# EAGLE board CoolNumbers (EAGLE 5.10)
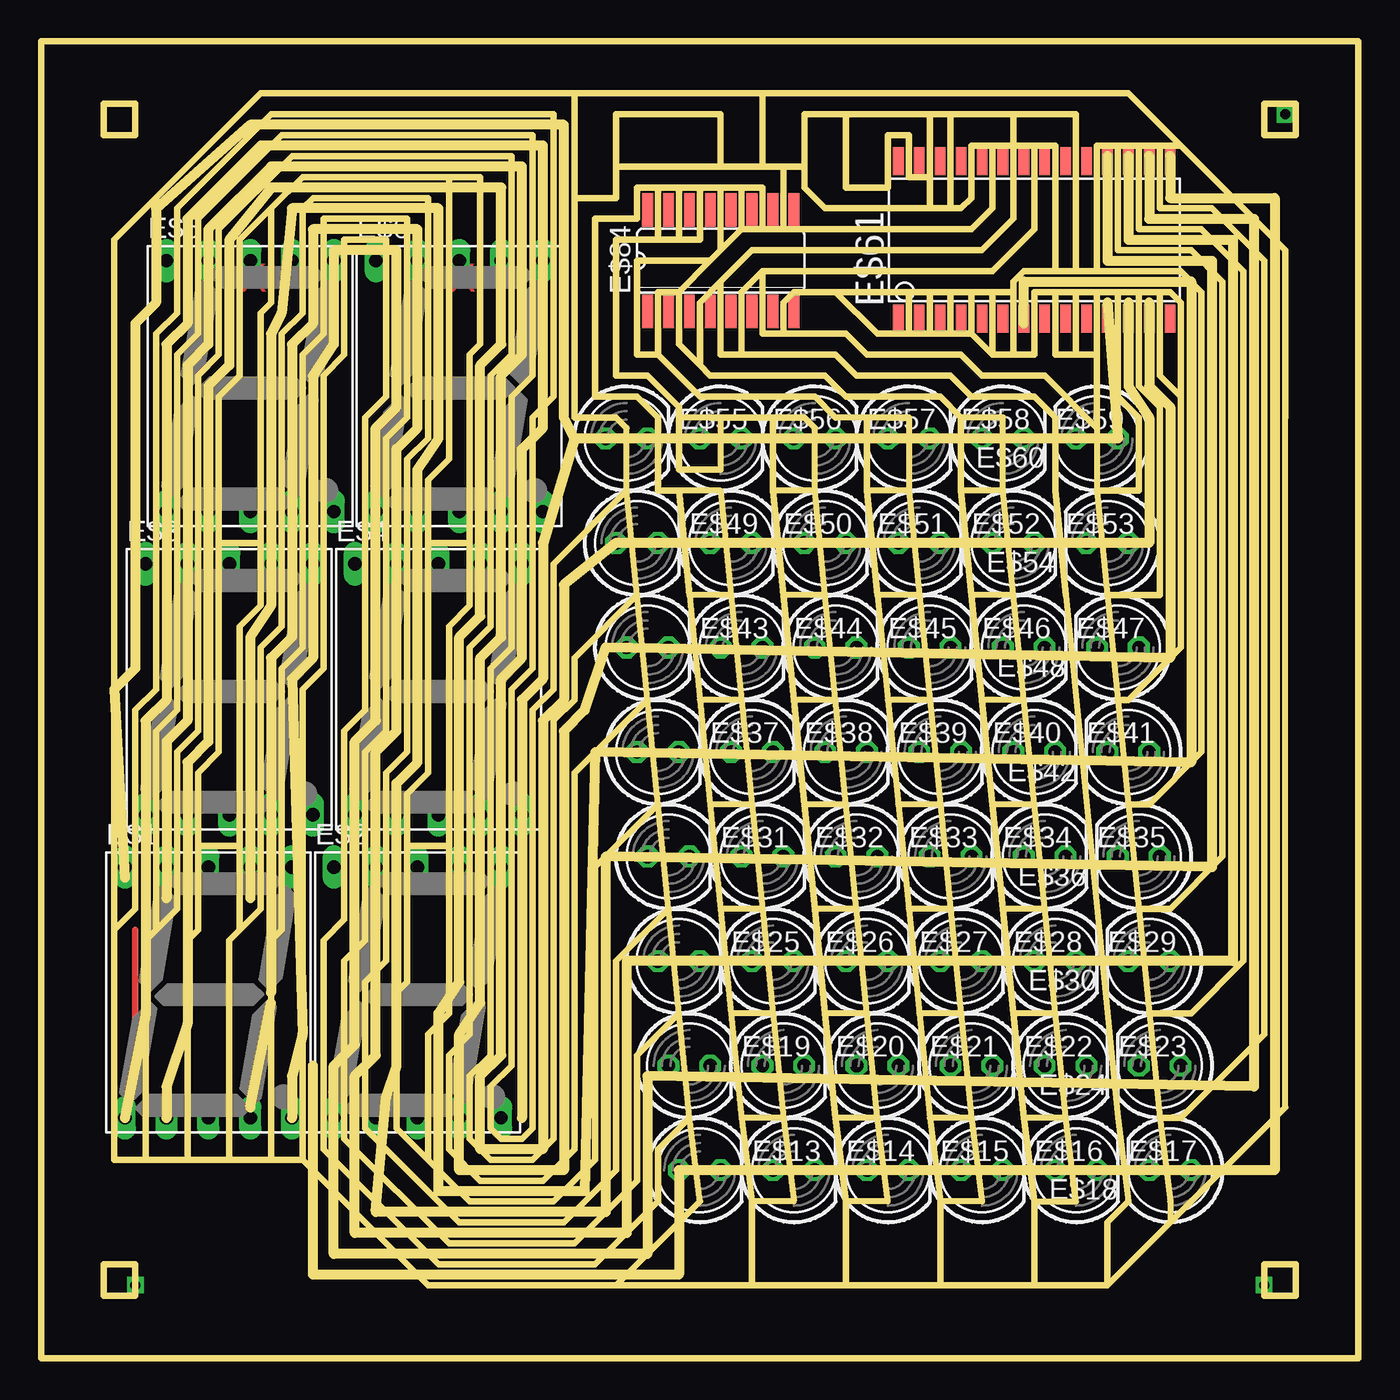
[diagram p0: board, top side]

Size 80.01 x 80.01 mm. Coordinates in mm from the lower left corner, seen from the top.
Outline: 39.37,14.61 40.01,9.53 34.92,4.45
Outline: 39.37,14.61 38.73,20.95
Outline: 38.73,20.95 38.1,27.3
Outline: 38.1,27.3 37.47,33.66
Outline: 37.47,33.66 36.83,40.01
Outline: 36.83,40.01 36.2,46.35
Outline: 36.2,46.35 35.56,52.7
Outline: 35.56,52.7 35.56,56.52 34.92,57.15 32.38,57.15 32.38,70.48
Outline: 39.37,46.35 40.01,40.01
Outline: 40.01,40.01 40.64,33.66
Outline: 40.64,33.66 41.27,27.3
Outline: 41.27,27.3 41.91,20.95
Outline: 41.91,20.95 42.55,14.61
Outline: 42.55,14.61 43.18,9.53
Outline: 41.91,46.35 41.27,52.7 38.73,52.7
Outline: 41.91,46.35 42.55,40.01
Outline: 42.55,40.01 43.18,33.66
Outline: 43.18,33.66 43.81,27.3
Outline: 43.81,27.3 44.45,20.95
Outline: 44.45,20.95 45.09,14.61
Outline: 45.09,14.61 45.72,9.53 43.18,9.53
Outline: 45.09,14.61 42.55,14.61
Outline: 44.45,20.95 41.91,20.95
Outline: 43.81,27.3 41.27,27.3
Outline: 43.18,33.66 40.64,33.66
Outline: 42.55,40.01 40.01,40.01
Outline: 41.91,46.35 39.37,46.35
Outline: 38.73,57.15 41.27,57.15 41.27,53.98 38.73,53.98 38.73,57.15
Outline: 39.37,14.61 37.47,12.7 37.47,9.53 33.66,5.71 24.13,5.71 17.14,12.7 17.14,25.4 18.41,26.67 18.41,38.1 19.68,39.37 19.68,57.15 20.95,58.42 20.95,67.94 18.41,67.94 18.41,60.96 17.14,59.69 17.14,41.91 15.88,40.64 15.88,12.06
Outline: 50.8,14.61 51.44,9.53 48.9,9.53
Outline: 50.8,14.61 50.16,20.95
Outline: 50.16,20.95 49.53,27.3
Outline: 49.53,27.3 48.9,33.66
Outline: 48.9,33.66 48.26,40.01
Outline: 48.26,40.01 47.62,46.35
Outline: 47.62,46.35 46.99,52.7
Outline: 46.99,52.7 46.99,56.52 46.35,57.15 44.45,57.15
Outline: 50.8,46.35 51.44,40.01
Outline: 51.44,40.01 52.07,33.66
Outline: 52.07,33.66 52.7,27.3
Outline: 52.7,27.3 53.34,20.95
Outline: 53.34,20.95 53.98,14.61
Outline: 53.98,14.61 54.61,9.53
Outline: 52.7,57.15 52.7,52.7
Outline: 52.7,52.7 53.34,46.35
Outline: 53.34,46.35 53.98,40.01
Outline: 53.98,40.01 54.61,33.66
Outline: 54.61,33.66 55.24,27.3
Outline: 55.24,27.3 55.88,20.95
Outline: 55.88,20.95 56.52,14.61
Outline: 56.52,14.61 57.15,9.53 54.61,9.53
Outline: 56.52,14.61 53.98,14.61
Outline: 55.88,20.95 53.34,20.95
Outline: 55.24,27.3 52.7,27.3
Outline: 54.61,33.66 52.07,33.66
Outline: 53.98,40.01 51.44,40.01
Outline: 53.34,46.35 50.8,46.35
Outline: 52.7,52.7 50.16,52.7
Outline: 52.7,57.15 50.16,57.15
Outline: 50.16,57.15 48.26,57.15 46.99,58.42 40.01,58.42 37.47,60.96
Outline: 46.99,52.7 44.45,52.7
Outline: 47.62,46.35 45.09,46.35
Outline: 48.26,40.01 45.72,40.01
Outline: 48.9,33.66 46.35,33.66
Outline: 49.53,27.3 46.99,27.3
Outline: 50.16,20.95 47.62,20.95
Outline: 50.8,14.61 48.26,14.61
Outline: 62.23,14.61 62.87,9.53 60.33,9.53
Outline: 62.23,14.61 61.59,20.95
Outline: 61.59,20.95 60.96,27.3
Outline: 60.96,27.3 60.33,33.66
Outline: 60.33,33.66 59.69,40.01
Outline: 59.69,40.01 59.05,46.35
Outline: 59.05,46.35 58.42,52.7
Outline: 58.42,52.7 58.42,57.15 55.88,57.15
Outline: 68.58,8.26 68.58,9.53 67.94,14.61
Outline: 64.14,56.52 64.14,57.15 64.14,60.96
Outline: 64.14,56.52 64.14,52.7
Outline: 64.14,52.7 64.77,46.35
Outline: 64.77,46.35 65.41,40.01
Outline: 65.41,40.01 66.04,33.66
Outline: 66.04,33.66 66.67,27.3
Outline: 66.67,27.3 67.31,20.95
Outline: 67.31,20.95 67.94,14.61
Outline: 58.42,52.7 55.88,52.7
Outline: 59.05,46.35 56.52,46.35
Outline: 59.69,40.01 57.15,40.01
Outline: 60.33,33.66 57.78,33.66
Outline: 60.96,27.3 58.42,27.3
Outline: 61.59,20.95 59.05,20.95
Outline: 62.23,14.61 59.69,14.61
Outline: 4.45,26.04 5.71,27.3 5.71,39.37 6.99,40.64 6.99,62.23 8.26,63.5 8.26,69.85 13.97,75.56 31.11,75.56 31.11,58.42 29.84,57.15 29.84,41.91 28.57,40.64 28.57,17.78 27.3,16.51 27.3,13.97 27.94,13.34 29.21,13.34 29.84,13.97 29.84,39.37 31.11,40.64 31.11,48.26 35.56,52.7
Outline: 6.99,26.04 8.26,27.3 8.26,36.83 9.53,38.1 9.53,59.69 10.79,60.96 10.79,68.58 15.24,73.03 28.57,73.03 28.57,60.96 27.3,59.69 27.3,44.45 26.04,43.18 26.04,19.68 24.77,18.41 24.77,12.7 26.67,10.79 30.48,10.79 32.38,12.7 32.38,35.56 36.83,40.01
Outline: 12.06,26.04 13.34,27.3 13.34,43.18 14.61,44.45 14.61,62.23 15.88,63.5 15.88,69.85 16.51,70.48 23.5,70.48 23.5,55.88 22.23,54.61 22.23,36.83 20.95,35.56 20.95,24.13 19.68,22.86 19.68,13.97 25.4,8.26 31.75,8.26 34.92,11.43 34.92,24.13 38.1,27.3
Outline: 11.43,12.06 11.43,25.4 12.06,26.04
Outline: 13.97,12.06 13.97,25.4 14.61,26.04 14.61,41.91 15.88,43.18 15.88,60.96 17.14,62.23 17.14,69.22 22.23,69.22 22.23,57.15 20.95,55.88 20.95,38.1 19.68,36.83 19.68,25.4 18.41,24.13 18.41,13.34 24.77,6.99 32.38,6.99 36.2,10.79 36.2,18.41 38.73,20.95
Outline: 15.88,12.06 13.97,12.06
Outline: 23.5,12.06 23.5,19.68 24.77,20.95 24.77,31.11
Outline: 6.99,26.04 6.35,25.4 6.35,12.06
Outline: 9.53,31.11 9.53,35.56 10.79,36.83 10.79,49.53
Outline: 9.53,31.11 9.53,26.04 8.89,25.4 8.89,12.06
Outline: 6.99,26.04 6.99,38.1 8.26,39.37 8.26,60.96 9.53,62.23 9.53,69.22 14.61,74.3 29.84,74.3 29.84,59.69 28.57,58.42 28.57,43.18 27.3,41.91 27.3,18.41 26.04,17.14 26.04,13.34 27.3,12.06 29.84,12.06 31.11,13.34 31.11,38.73 32.38,40.01 32.38,42.55 36.2,46.35
Outline: 12.06,26.04 12.06,31.11
Outline: 12.06,31.11 12.06,44.45 13.34,45.72 13.34,49.53
Outline: 22.23,31.11 22.23,22.86 21.59,22.23 21.59,13.97 23.5,12.06
Outline: 22.23,31.11 22.23,34.29 23.5,35.56 23.5,49.53
Outline: 24.77,31.11 24.77,44.45 26.04,45.72 26.04,49.53
Outline: 4.45,26.04 4.45,67.94 13.34,76.83 32.38,76.83
Outline: 13.34,49.53 13.34,63.5 13.97,64.14 13.97,69.85
Outline: 9.53,31.11 12.06,31.11
Outline: 10.79,49.53 13.34,49.53
Outline: 26.04,49.53 23.5,49.53
Outline: 24.77,31.11 22.23,31.11
Outline: 26.04,49.53 26.04,60.96 26.67,61.59 26.67,71.75 24.77,71.75
Outline: 4.45,26.04 4.45,12.06 6.35,12.06
Outline: 10.79,49.53 10.79,58.42 12.06,59.69 12.06,67.94 13.97,69.85
Outline: 23.5,49.53 23.5,53.34 24.77,54.61 24.77,71.75
Outline: 32.38,70.48 32.38,76.83
Outline: 24.77,71.75 15.88,71.75 13.97,69.85
Outline: 37.47,33.66 33.66,29.84 33.66,12.06 31.11,9.53 26.04,9.53 23.5,12.06
Outline: 39.37,46.35 38.73,52.7
Outline: 48.9,9.53 48.26,14.61
Outline: 48.26,14.61 47.62,20.95
Outline: 47.62,20.95 46.99,27.3
Outline: 46.99,27.3 46.35,33.66
Outline: 46.35,33.66 45.72,40.01
Outline: 45.72,40.01 45.09,46.35
Outline: 45.09,46.35 44.45,52.7
Outline: 50.8,46.35 50.16,52.7
Outline: 50.16,52.7 50.16,57.15
Outline: 60.33,9.53 59.69,14.61
Outline: 59.69,14.61 59.05,20.95
Outline: 59.05,20.95 58.42,27.3
Outline: 58.42,27.3 57.78,33.66
Outline: 57.78,33.66 57.15,40.01
Outline: 57.15,40.01 56.52,46.35
Outline: 56.52,46.35 55.88,52.7
Outline: 55.88,52.7 55.88,57.15
Outline: 13.97,12.06 11.43,12.06
Outline: 11.43,12.06 8.89,12.06
Outline: 8.89,12.06 6.35,12.06
Outline: 67.94,14.61 69.22,14.61 74.3,19.68 74.3,66.67 71.12,69.85 67.94,69.85 67.94,73.66
Outline: 67.31,20.95 69.85,20.95 73.03,24.13 73.03,66.04 70.48,68.58 66.67,68.58 66.67,73.66
Outline: 66.67,27.3 68.58,27.3 71.75,30.48 71.75,65.41 69.85,67.31 65.41,67.31 65.41,73.66
Outline: 66.04,33.66 67.31,33.66 70.48,36.83 70.48,64.77 69.22,66.04 64.14,66.04
Outline: 65.41,40.01 66.04,40.01 69.22,43.18 69.22,58.42
Outline: 64.77,46.35 67.94,46.35 67.94,57.78 66.67,59.05 66.67,64.77
Outline: 64.14,60.96 64.14,64.77
Outline: 65.41,64.77 65.41,58.42 66.67,57.15 66.67,52.7 64.14,52.7
Outline: 69.22,58.42 67.94,59.69 67.94,64.77
Outline: 64.14,66.04 64.14,73.66 65.41,73.66
Outline: 65.41,73.66 66.67,73.66
Outline: 66.67,73.66 67.94,73.66
Outline: 60.33,73.66 61.59,73.66 61.59,66.04
Outline: 69.22,58.42 69.22,64.14 68.58,64.77 67.94,64.77
Outline: 64.14,66.04 62.87,66.04
Outline: 62.87,66.04 61.59,66.04
Outline: 62.87,66.04 62.87,75.56 59.05,75.56
Outline: 56.52,62.23 55.24,62.23
Outline: 55.24,62.23 53.98,62.23
Outline: 53.98,62.23 52.7,62.23
Outline: 52.7,62.23 50.8,62.23 48.26,64.77
Outline: 61.59,64.77 60.33,64.77 60.33,60.96 59.05,60.96
Outline: 61.59,64.77 62.87,64.77
Outline: 62.87,64.77 64.14,64.77
Outline: 64.14,64.77 65.41,64.77
Outline: 65.41,64.77 66.67,64.77
Outline: 66.67,64.77 67.94,64.77
Outline: 52.7,57.15 51.44,57.15
Outline: 61.59,66.04 59.69,66.04 59.05,65.41 59.05,64.77
Outline: 48.26,64.77 52.7,64.77
Outline: 52.7,64.77 53.98,64.77
Outline: 53.98,64.77 55.24,64.77
Outline: 55.24,64.77 56.52,64.77
Outline: 56.52,64.77 57.78,64.77
Outline: 57.78,64.77 59.05,64.77
Outline: 61.59,64.77 61.59,60.96 62.87,60.96
Outline: 45.09,62.23 45.09,64.14 45.72,64.77 48.26,64.77
Outline: 43.81,66.04 43.81,62.23 45.09,62.23
Outline: 60.33,73.66 60.33,68.58 57.78,66.04 43.81,66.04
Outline: 42.55,60.96 42.55,64.77 43.81,66.04
Outline: 42.55,60.96 41.27,60.96 41.27,65.41
Outline: 59.05,73.66 60.33,73.66
Outline: 38.73,64.77 38.73,61.59 40.01,60.33
Outline: 57.78,73.66 59.05,73.66
Outline: 59.05,73.66 59.05,69.22 57.15,67.31 43.18,67.31 41.27,65.41
Outline: 42.55,68.58 43.81,68.58
Outline: 43.81,68.58 45.09,68.58
Outline: 45.09,68.58 56.52,68.58 57.78,69.85 57.78,73.66
Outline: 57.78,73.66 56.52,73.66 56.52,70.48 55.88,69.85 55.24,69.85
Outline: 55.24,69.85 53.98,69.85
Outline: 53.98,69.85 47.62,69.85 46.35,71.12 46.35,72.39
Outline: 45.09,72.39 45.09,68.58
Outline: 40.01,60.33 40.64,59.69 47.62,59.69 48.9,58.42 54.61,58.42 55.88,57.15
Outline: 40.01,60.33 40.01,64.14 41.27,65.41
Outline: 37.47,71.12 38.73,71.12
Outline: 41.27,71.12 42.55,71.12
Outline: 45.09,62.23 48.9,62.23 50.16,60.96 55.88,60.96 57.15,59.69 60.96,59.69 64.14,56.52
Outline: 42.55,60.96 48.26,60.96 49.53,59.69 55.24,59.69 56.52,58.42 60.33,58.42 61.59,57.15 61.59,52.7 62.23,46.35 65.41,14.61 66.04,9.53 64.77,8.26 64.77,4.45
Outline: 38.73,64.77 40.64,66.67
Outline: 40.64,66.67 41.27,67.31
Outline: 41.27,67.31 42.55,68.58
Outline: 38.73,64.77 37.47,64.77 37.47,60.96
Outline: 44.45,57.15 40.64,57.15
Outline: 38.73,67.94 40.01,67.94 40.01,71.12
Outline: 42.55,68.58 42.55,71.12
Outline: 44.45,52.7 44.45,57.15
Outline: 37.47,60.96 36.2,60.96 36.2,66.67 40.64,66.67
Outline: 38.73,52.7 37.47,52.7 37.47,57.15 36.2,58.42 33.66,58.42 33.66,69.22 36.2,69.22 36.2,71.12 37.47,71.12
Outline: 41.27,71.12 41.27,67.31
Outline: 37.47,71.12 37.47,67.94
Outline: 37.47,67.94 34.92,67.94 34.92,59.69 36.83,59.69 38.73,57.78 38.73,57.15
Outline: 37.47,67.94 38.73,67.94
Outline: 52.7,62.23 52.7,64.77
Outline: 53.98,62.23 53.98,64.77
Outline: 55.24,62.23 55.24,64.77
Outline: 56.52,62.23 56.52,64.77
Outline: 43.81,68.58 43.81,71.12 42.55,71.12
Outline: 53.98,75.56 48.9,75.56
Outline: 48.9,75.56 46.35,75.56 46.35,72.39
Outline: 32.38,76.83 41.27,76.83 43.81,76.83
Outline: 53.98,75.56 55.24,75.56
Outline: 55.24,75.56 59.05,75.56
Outline: 69.22,73.66 67.94,73.66
Outline: 53.98,69.85 53.98,71.75
Outline: 53.98,71.75 53.98,75.56
Outline: 55.24,75.56 55.24,69.85
Outline: 45.09,72.39 43.81,72.39
Outline: 43.81,72.39 41.27,72.39
Outline: 48.9,75.56 48.9,71.12 51.44,71.12 51.44,74.3 52.7,74.3 52.7,71.75 53.98,71.75
Outline: 38.73,71.12 38.73,67.94
Outline: 45.09,72.39 46.35,72.39
Outline: 41.27,72.39 41.27,75.56 34.92,75.56 34.92,72.39
Outline: 0,80 0,0 80.01,0 80.01,80.01
Outline: 0,80.01 80,80.01
Outline: 68.58,8.26 75.56,15.24 75.56,57.15 75.56,67.31 66.04,76.83 43.81,76.83
Outline: 15.88,12.06 23.5,4.45 34.92,4.45
Outline: 38.73,71.12 40.01,71.12
Outline: 40.01,71.12 41.27,71.12
Outline: 34.92,4.45 43.18,4.45
Outline: 43.18,4.45 48.9,4.45
Outline: 48.9,4.45 54.61,4.45
Outline: 54.61,4.45 60.33,4.45
Outline: 60.33,4.45 64.77,4.45
Outline: 60.33,9.53 60.33,4.45
Outline: 43.18,9.53 43.18,4.45
Outline: 48.9,9.53 48.9,4.45
Outline: 54.61,9.53 54.61,4.45
Outline: 68.58,8.26 64.77,4.45
Outline: 59.05,73.66 59.05,75.56
Outline: 59.05,60.96 57.78,60.96
Outline: 57.78,60.96 56.52,62.23
Outline: 57.78,60.96 57.78,64.77
Outline: 59.05,60.96 59.05,64.77
Outline: 41.27,72.39 34.92,72.39
Outline: 62.87,60.96 64.14,60.96
Outline: 62.87,60.96 62.87,64.77
Outline: 43.81,76.83 43.81,72.39
Outline: 32.38,70.48 34.92,70.48 34.92,72.39
Outline: 76.2,76.2 76.2,74.3 74.3,74.3 74.3,76.2 76.2,76.2
Outline: 76.2,3.81 74.3,3.81 74.3,5.71 76.2,5.71 76.2,3.81
Outline: 3.81,3.81 3.81,5.71 5.71,5.71 5.71,3.81 3.81,3.81
Outline: 3.81,76.2 5.71,76.2 5.71,74.3 3.81,74.3 3.81,76.2
Copper layers (1*16): Top 0.035mm / dielectric 1.5mm / Bottom 0.035mm
Design rules "default": minimum track width 10mil, minimum drill 24mil, track to track 8mil, track to pad 8mil, pad to pad 8mil, via to via 8mil, smd to smd 8mil, copper to edge 40mil, drill to drill 8mil, minimum pad ring 10mil, minimum via ring 8mil, stop-mask expansion 4mil, vias tented up to drill 0mil, thermal gap 10mil
Milling: 150 lines

## Footprints (pad centres in the part's own frame; a part is rotated, then mirrored left to right if it is on the bottom)
HDSP-M = drill 0.813 long: 1 -5.08,-7.62; 2 -2.54,-7.62; 3 0,-7.62; 4 2.54,-7.62; 5 5.08,-7.62; 6 5.08,7.62; 7 2.54,7.62; 8 0,7.62; 9 -2.54,7.62; 10 -5.08,7.62
LED5MM = drill 0.813 octagon: A -1.27,0; K 1.27,0
SO28W = smd 0.65 x 1.7: 1 -7.62,-4.78; 2 -6.35,-4.78; 3 -5.08,-4.78; 4 -3.81,-4.78; 5 -2.54,-4.78; 6 -1.27,-4.78; 7 0,-4.78; 8 1.27,-4.78; 9 2.54,-4.78; 10 3.81,-4.78; 11 5.08,-4.78; 12 6.35,-4.78; 13 7.62,-4.78; 14 8.89,-4.78; 15 8.89,4.78; 16 7.62,4.78; 17 6.35,4.78; 18 5.08,4.78; 19 3.81,4.78; 20 2.54,4.78; 21 1.27,4.78; 22 0,4.78; 23 -1.27,4.78; 24 -2.54,4.78; 25 -3.81,4.78; 26 -5.08,4.78; 27 -6.35,4.78; 28 -7.62,4.78
SO16 = smd 0.66 x 2.032: 1 -4.445,-3.073; 2 -3.175,-3.073; 3 -1.905,-3.073; 4 -0.635,-3.073; 5 0.635,-3.073; 6 1.905,-3.073; 7 3.175,-3.073; 8 4.445,-3.073; 9 4.445,3.073; 10 3.175,3.073; 11 1.905,3.073; 12 0.635,3.073; 13 -0.635,3.073; 14 -1.905,3.073; 15 -3.175,3.073; 16 -4.445,3.073

## Placement (x,y rotation side)
E$1  [HDSP-M]  10.16,22.23 0 top
E$2  [HDSP-M]  22.86,22.23 0 top
E$3  [HDSP-M]  11.43,40.64 0 top
E$4  [HDSP-M]  24.13,40.64 0 top
E$5  [HDSP-M]  12.7,59.05 0 top
E$6  [HDSP-M]  25.4,59.05 0 top
E$13  [LED5MM]  40.01,11.43 0 top
E$14  [LED5MM]  45.72,11.43 0 top
E$15  [LED5MM]  51.44,11.43 0 top
E$16  [LED5MM]  57.15,11.43 0 top
E$17  [LED5MM]  62.87,11.43 0 top
E$18  [LED5MM]  68.58,11.43 180 top
E$19  [LED5MM]  39.37,17.78 0 top
E$20  [LED5MM]  45.09,17.78 0 top
E$21  [LED5MM]  50.8,17.78 0 top
E$22  [LED5MM]  56.52,17.78 0 top
E$23  [LED5MM]  62.23,17.78 0 top
E$24  [LED5MM]  67.94,17.78 180 top
E$25  [LED5MM]  38.73,24.13 0 top
E$26  [LED5MM]  44.45,24.13 0 top
E$27  [LED5MM]  50.16,24.13 0 top
E$28  [LED5MM]  55.88,24.13 0 top
E$29  [LED5MM]  61.59,24.13 0 top
E$30  [LED5MM]  67.31,24.13 180 top
E$31  [LED5MM]  38.1,30.48 0 top
E$32  [LED5MM]  43.81,30.48 0 top
E$33  [LED5MM]  49.53,30.48 0 top
E$34  [LED5MM]  55.24,30.48 0 top
E$35  [LED5MM]  60.96,30.48 0 top
E$36  [LED5MM]  66.67,30.48 180 top
E$37  [LED5MM]  37.47,36.83 0 top
E$38  [LED5MM]  43.18,36.83 0 top
E$39  [LED5MM]  48.9,36.83 0 top
E$40  [LED5MM]  54.61,36.83 0 top
E$41  [LED5MM]  60.33,36.83 0 top
E$42  [LED5MM]  66.04,36.83 180 top
E$43  [LED5MM]  36.83,43.18 0 top
E$44  [LED5MM]  42.55,43.18 0 top
E$45  [LED5MM]  48.26,43.18 0 top
E$46  [LED5MM]  53.98,43.18 0 top
E$47  [LED5MM]  59.69,43.18 0 top
E$48  [LED5MM]  65.41,43.18 180 top
E$49  [LED5MM]  36.2,49.53 0 top
E$50  [LED5MM]  41.91,49.53 0 top
E$51  [LED5MM]  47.62,49.53 0 top
E$52  [LED5MM]  53.34,49.53 0 top
E$53  [LED5MM]  59.05,49.53 0 top
E$54  [LED5MM]  64.77,49.53 180 top
E$55  [LED5MM]  35.56,55.88 0 top
E$56  [LED5MM]  41.27,55.88 0 top
E$57  [LED5MM]  46.99,55.88 0 top
E$58  [LED5MM]  52.7,55.88 0 top
E$59  [LED5MM]  58.42,55.88 0 top
E$60  [LED5MM]  64.14,55.88 180 top
E$61  [SO28W]  59.69,67.94 0 top
E$84  [SO16]  41.27,66.67 0 top

## Library data of the parts
E$1-E$6 = display-hp
E$13-E$60 = led
E$61 = microchip
E$84 = 40xx

## Tracks (layer width: path | path; a pad name or v marks a point on that pad's centre or on a via)
S$1
  Top 0.406: 5.71,16.51 5.71,26.04
S$2  (via drill 0.6)
  other vias: 5.71,4.45
S$4  (via drill 0.6)
  other vias: 74.3,4.45
S$5  (via drill 0.6)
  other vias: 75.56,75.56
(copper drawn outside any net)
  shapes: Top area x1752

## Text on the board
Top: X | X
Unrouted: MCLR | VDD | VSS | PGD | PGC | PGD | PGC | RB5 | RB4 | RB3 | RB2 | RB1 | RB0 | VDD | VSS | RC7 | RC6 | RC5 | RC4 | 6Y | 6A | 5Y | 5A | 4Y | 4A | VDD | 1Y | 1A | 2Y | 2A | 3Y | 3A | VSS | MCLR | RA0 | RA1 | RA2 | RA3 | RA4 | RA5 | VSS | OSC1 | OSC2 | RC0 | RC1 | RC2 | VUSB | 1 | 2 | 3 | 4